# Altium PCB AERO_Geek.PcbDoc
Units mm, origin at the board's own origin, x right, y up, seen from the top; angles counter-clockwise.
Board outline 152.4 x 101.6 mm, 4 copper layers (Top Layer, GND, Power, Bottom Layer), stack 0.778 mm thick; 74 components, 73 nets, 423 pads, 0 vias.
Unrouted connection lines stored in the file: 3.
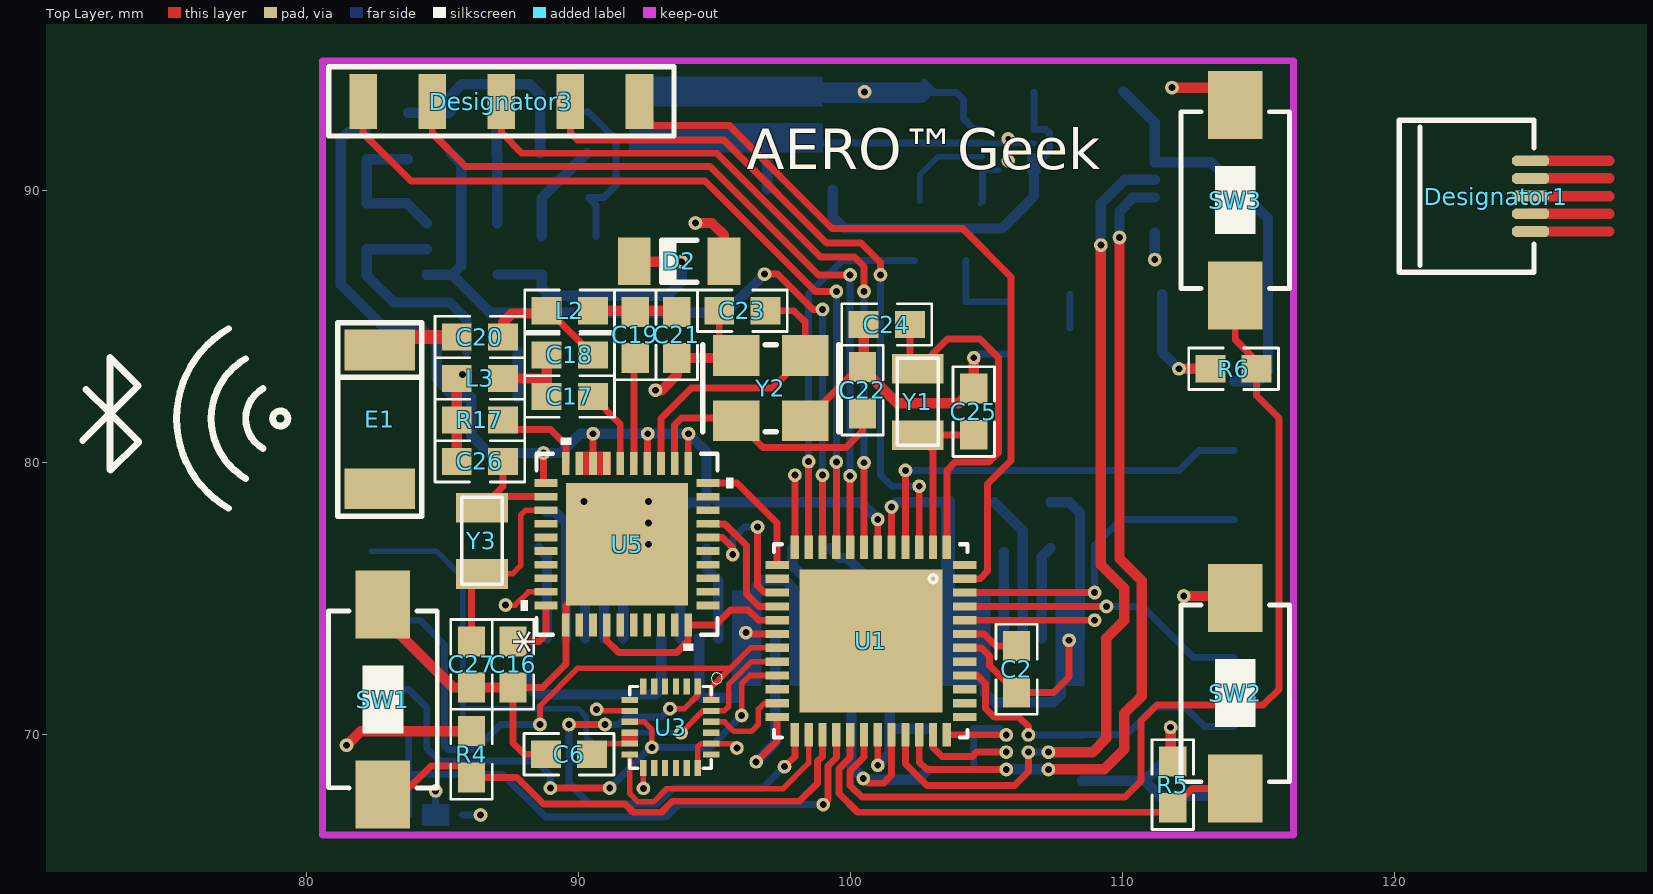
[diagram p0: Top Layer view]
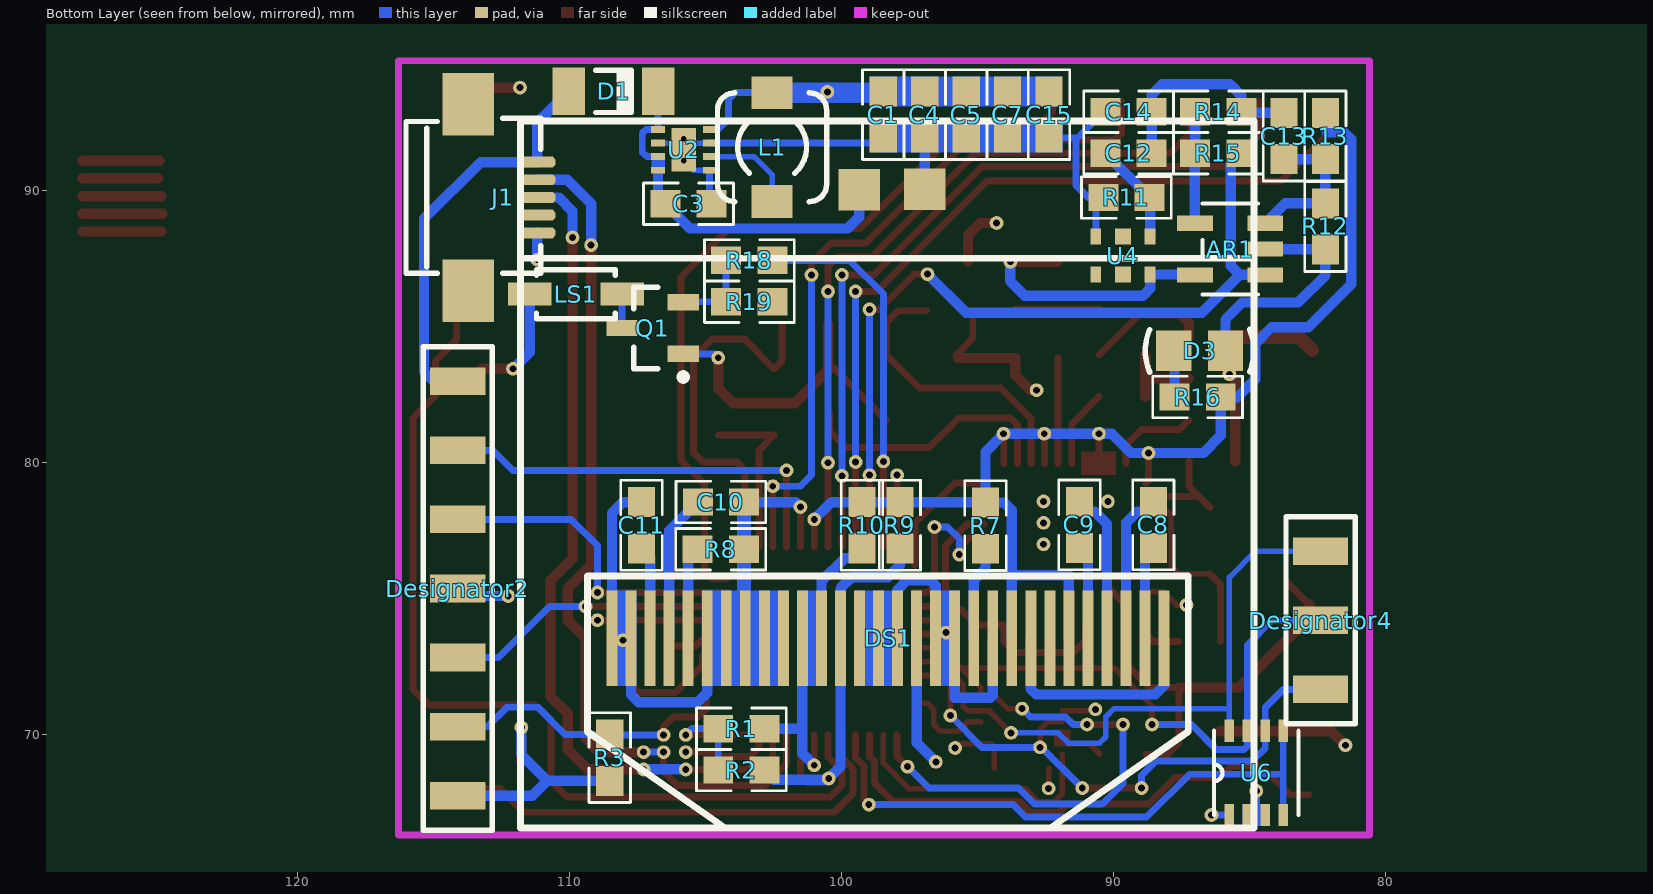
[diagram p1: Bottom Layer view, seen from below]
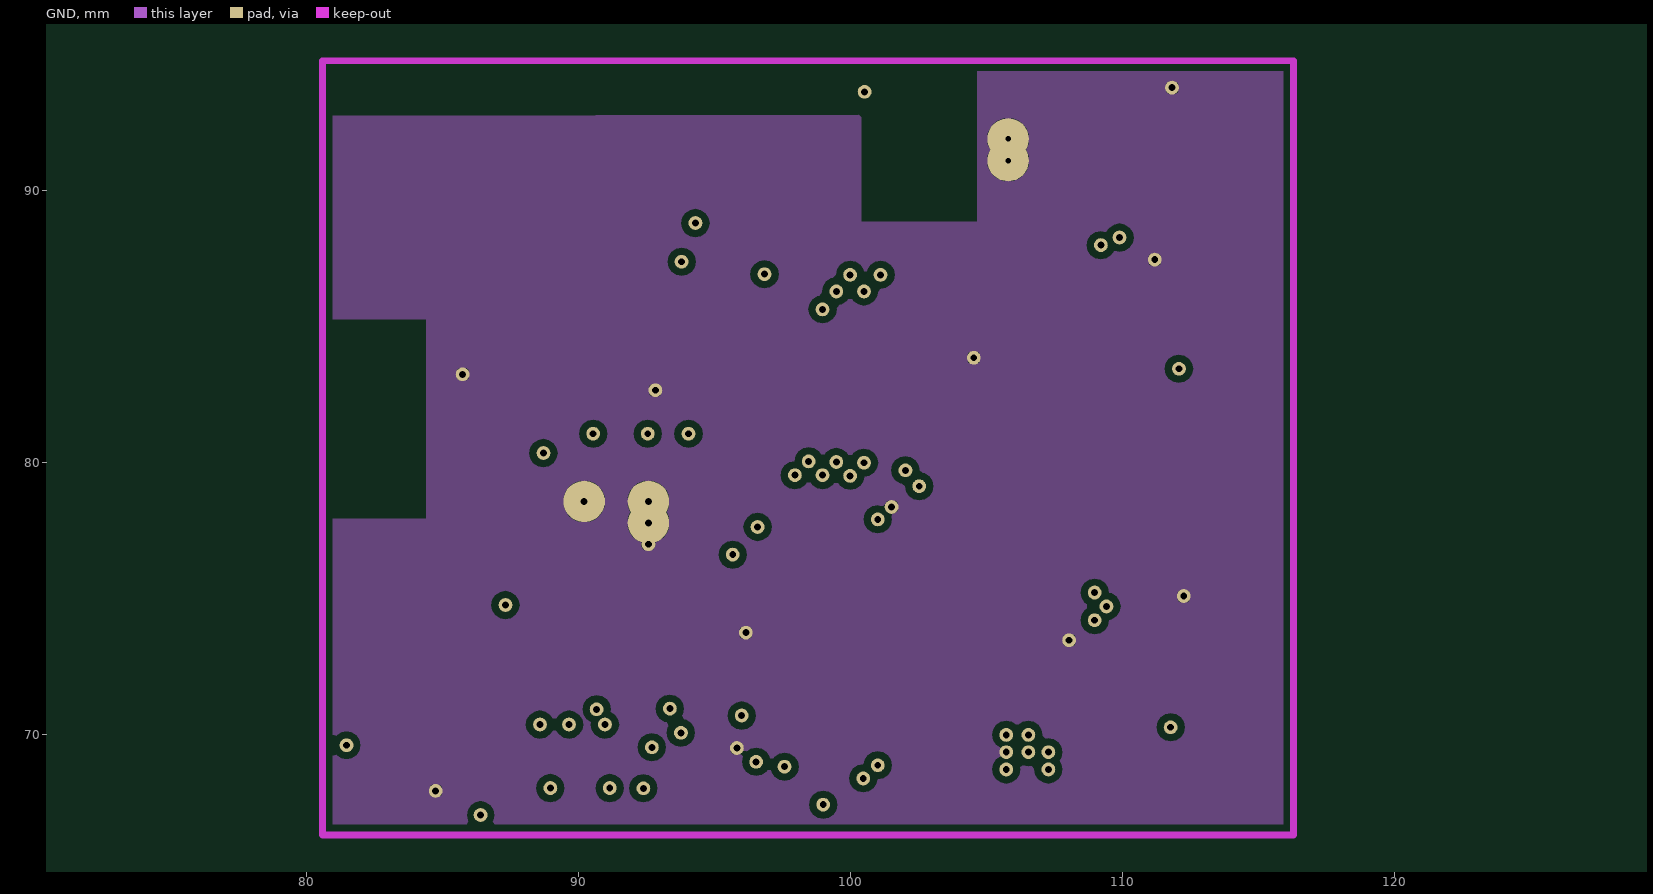
[diagram p2: GND]
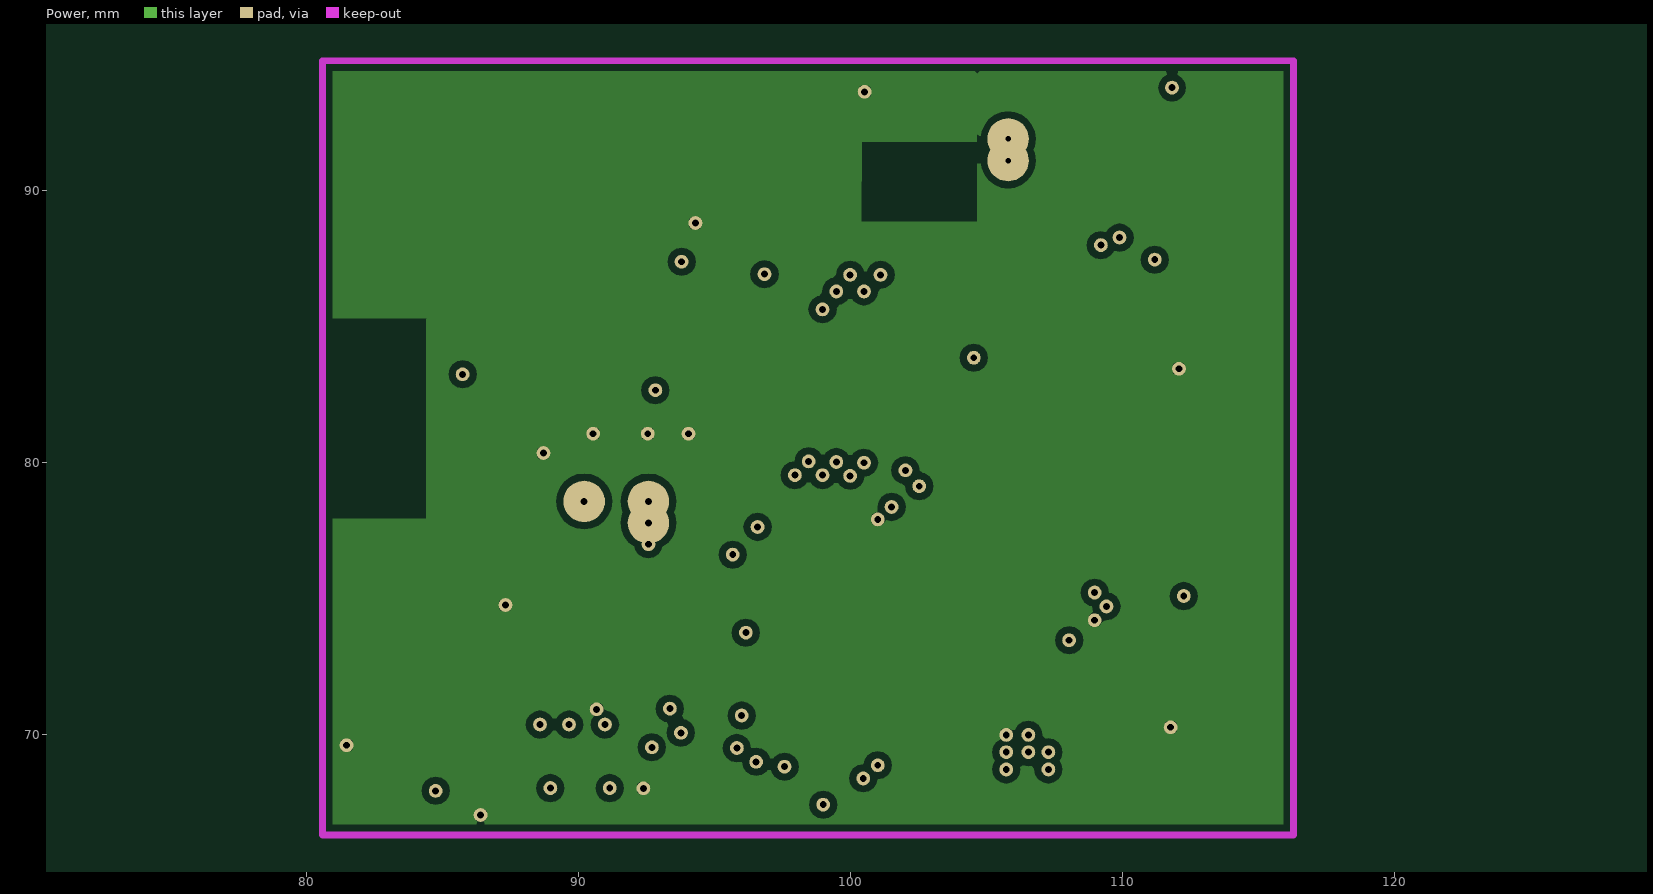
[diagram p3: Power]

## Layer stack, top to bottom
Top Solder: solder mask 0.0102, Solder Resist, Dk 3.5
Top Layer: signal copper 0.0356
Dielectric 1: core 0.254, FR-4, Dk 4.2
GND: signal copper 0.036
Dielectric 3: prepreg 0.127, Dk 4.2
Power: signal copper 0.036
Dielectric 2: core 0.254, Dk 4.2
Bottom Layer: signal copper 0.0356
Bottom Solder: solder mask 0.0102, Solder Resist, Dk 3.5

## Board outline
25.4,25.4 177.8,25.4 177.8,127 25.4,127

## Design rules (kind name [scope] priority, off if disabled: settings)
Clearance [All] p1: gap=0.254
ComponentClearance [All] p1 off: gap=0.254 collisioncheckmode=3 verticalgap=0.254 showdistances=FALSE
PolygonConnect [IsSMTPin Or IsVia vs IsPoly] p1: connectstyle=Direct reliefconductorwidth=0.254 reliefentries=4 polygonreliefangle="90 Angle" airgapwidth=0.254
RoutingVias [All] p1: holewidth=0.711 width=1.27 viastyle="Through Hole" minholewidth=0.711 minwidth=1.27 maxholewidth=0.711 maxwidth=1.27
ShortCircuit [All] p1: allowed=TRUE
SolderMaskExpansion [All] p1: expansion=0.102
UnpouredPolygon [All] p1: allowunpoured=TRUE allowshelved=TRUE
Width [All] p1: maxlimit=2.54 minlimit=0.025 preferedwidth=0.254
27 further rules are at their usual default settings.

## Classes and differential pairs
component class "USB Port": C3 C4 D1 J1 L1 U2
component class Processor: C1 C2 C24 C25 LS1 Q1 R1 R2 R3 R4 R5 R6 R18 R19 SW1 SW2 SW3 U1 Y1
component class "Motion Sensor": C5 C6 U3
component class Display: C7 C8 C9 C10 C11 DS1 R7 R8 R9 R10
component class Bluetooth: C16 C17 C18 C19 C20 C21 C22 C23 C26 C27 E1 L2 L3 R17 U5 Y2 Y3
component class "Beats Monitor": AR1 C12 C13 C14 C15 D2 D3 R11 R12 R13 R14 R15 R16 U4
component class Barometer: C1 U6

## Components (designator, comment, footprint, x,y, rotation, side; value= is the part's Value field where it differs from the comment)
AR1 "MCP6001" SOT23-5 85.725,87.841 r0 bottom
C1 "" 0603 98.476,92.786 r90 bottom
C2 "1uF" 0603 106.121,72.39 r270 top
C3 "" 0603 105.639,89.51 r0 bottom
C4 "" 0603 96.952,92.786 r90 bottom
C5 "CAP" 0603 95.428,92.786 r90 bottom
C6 "CAP" 0603 89.662,69.266 r0 top
C7 "CAP" 0603 93.904,92.786 r90 bottom
C8 "CAP" 0603 88.544,77.699 r90 bottom
C9 "CAP" 0603 91.262,77.699 r270 bottom
C10 "CAP" 0603 104.445,78.537 r0 bottom
C11 "CAP" 0603 107.366,77.686 r270 bottom
C12 "CAP" 0603 89.459,91.364 r180 bottom
C13 "CAP" 0603 83.744,91.999 r270 bottom
C14 "CAP" 0603 89.459,92.888 r180 bottom
C15 "CAP" 0603 92.38,92.786 r90 bottom
C16 "CAP" 0603 87.605,72.568 r270 top
C17 "CAP" 0603 89.687,82.423 r180 top
C18 "CAP" 0603 89.687,83.947 r0 top
C19 "CAP" 0603 92.1,84.684 r90 top
C20 "CAP" 0603 86.385,84.607 r180 top
C21 "CAP" 0603 93.624,84.684 r270 top
C22 "CAP" 0603 100.457,82.652 r270 top
C23 "CAP" 0603 96.037,85.573 r0 top
C24 "CAP" 0603 101.346,85.065 r180 top
C25 "CAP" 0603 104.546,81.864 r90 top
C26 "CAP" 0603 86.385,80.035 r180 top
C27 "CAP" 0603 86.081,72.568 r270 top
D1 "Diode" Diode-SOC 108.382,93.624 r180 bottom
D2 "Diode" Diode-SOC 93.701,87.401 r180 top
D3 "LED" 0805 86.843,84.099 r180 bottom
Designator1 "Comment" "Micro Type-B" 122.479,89.789 r180 top
Designator2 "Comment" HDR1X7 114.122,67.742 r90 bottom
Designator3 "Comment" HDR1X5 92.253,93.269 r180 top
Designator4 "Comment" HDR1X3 82.398,76.733 r270 bottom
DS1 "0.96 OLED" 12864 88.151,73.533 r0 bottom
E1 "Antenna" A6150 82.702,81.458 r270 top
J1 "micro USB" "micro Type-B" 113.741,89.738 r0 bottom
L1 "Inductor" 0420 102.565,91.592 r90 bottom
L2 "Inductor" 0603 89.687,85.573 r180 top
L3 "Inductor" 0603 86.385,83.083 r180 top
LS1 "Buzzer" 420 109.779,86.182 r180 bottom
Q1 "NPN" SOT23 106.959,84.938 r0 bottom
R1 "RES" 0603 103.695,70.206 r0 bottom
R2 "RES" 0603 103.695,68.682 r0 bottom
R3 "RES" 0603 108.534,69.139 r270 bottom
R4 "RES" 0603 86.081,69.266 r270 top
R5 "RES" 0603 111.862,68.148 r270 top
R6 "RES" 0603 114.097,83.439 r0 top
R7 "RES" 0603 94.717,77.673 r270 bottom
R8 "RES" 0603 104.453,76.803 r0 bottom
R9 "RES" 0603 97.866,77.686 r270 bottom
R10 "RES" 0603 99.263,77.686 r270 bottom
R11 "RES" 0603 89.535,89.738 r180 bottom
R12 "RES" 0603 82.22,88.671 r90 bottom
R13 "RES" 0603 82.22,91.999 r90 bottom
R14 "RES" 0603 86.157,92.888 r0 bottom
R15 "RES" 0603 86.157,91.364 r180 bottom
R16 "RES" 0603 86.919,82.398 r180 bottom
R17 "RES" 0603 86.385,81.559 r180 top
R18 "RES" 0603 103.403,87.427 r0 bottom
R19 "RES" 0603 103.403,85.903 r0 bottom
SW1 "SW" SW-PB2 82.829,71.323 r270 top
SW2 "SW" SW-PB2 114.173,71.552 r270 top
SW3 "SW" SW-PB2 114.173,89.687 r270 top
U1 "SAMD21G18A-AUT" QFN48 100.762,73.431 r270 top
U2 "TPS62063" DSG08 105.811,91.491 r0 bottom
U3 "MPU9250" QFN24 93.396,70.256 r270 top
U4 "APDS-9008" chipLED 89.662,87.605 r180 bottom
U5 "CC2540" VQFN40 91.796,76.987 r90 top
U6 "MS5611" QFN8 84.76,68.58 r90 bottom
Y1 "XTAL" ABS07 102.489,82.22 r90 top
Y2 "Oscillator" ASFL1 97.079,82.728 r0 top
Y3 "XTAL" ABS07 86.462,77.114 r90 top

## Footprints (in the part's own frame and the unit in brackets; to place one, negate y for a bottom-side part, rotate by r counter-clockwise, add the part's x,y. Pads: shape width x height; smd on the part's side, far side on the other; paste and mask are expansions set on the pad)
0420 [mm]
  rect 1.2x1.5 smd: 1(-2,0) 2(2,0)
  silkscreen extent -2.01,-2.01 1.99,2.01, body extent -2,-2 2,2, height 4
420 [mm]
  rect 1.6x0.85 smd: 1(-1.7,0) 2(1.7,0)
  silkscreen extent -1.45,-0.9 1.45,0.9
0603 [mm] "Chip Capacitor, Body 1.0x0.5mm, IPC High Density"
  rect 1.1x1 smd: 1(-0.85,0) 2(0.85,0)
  silkscreen extent -1.65,-0.76 1.65,0.76, body extent -1.14,-0.38 1.14,0.38, height 1
0805 [mm]
  rect 1.3x1.5 smd: 1(-0.95,0) 2(0.95,0)
  silkscreen extent -2,-0.79 2,0.79, body extent -1.27,-0.64 1.27,0.64, height 0.9
12864 [mm]
  rect 0.4x3.5 smd: 1(0,0) 2(0.7,0) 3(1.4,0) 4(2.1,0) 5(2.8,0) 6(3.5,0) 7(4.2,0) 8(4.9,0) 9(5.6,0) 10(6.3,0) 11(7,0) 12(7.7,0) 13(8.4,0) 14(9.1,0) 15(9.8,0) 16(10.5,0) 17(11.2,0) 18(11.9,0) 19(12.6,0) 20(13.3,0) 21(14,0) 22(14.7,0) 23(15.4,0) 24(16.1,0) 25(16.8,0) 26(17.5,0) 27(18.2,0) 28(18.9,0) 29(19.6,0) 30(20.3,0)
  silkscreen extent -3.3,-19.01 23.66,6.98
A6150 [mm]
  rect 1.5x2.6 smd: 1(-2.667,0) N/A(2.433,0)
  silkscreen extent -3.67,-1.55 3.43,1.55, body extent -3.18,-1.99 2.92,1.91, height 1.1
ABS07 [mil]
  rect 43x75 smd paste-1000 mask-1000: 1(-48,0) 2(48,0)
  silkscreen extent -63,-30 63,30
ASFL1 [mm]
  rect 1.7x1.5 smd paste-25.4 mask-25.4: 1(-1.27,-1.2) 2(1.27,-1.2) 3(1.27,1.2) 4(-1.27,1.2)
  silkscreen extent -2.5,-1.6 2.5,1.6
chipLED [mm]
  rect 0.4x0.6 smd paste-25.4 mask-25.4: 1(-1,0.7) 3(1,0.7) 4(1,-0.7) 6(-1,-0.7)
  rect 0.6x0.6 smd paste-25.4 mask-25.4: 2(0,0.7) 5(0,-0.7)
Diode-SOC [mm]
  rect 1.2x1.75 smd: 1(-1.663,0.013) 2(1.637,0.013)
  silkscreen extent -0.66,-0.76 0.64,0.79, body extent -1.86,-0.78 1.84,0.81, height 1.59
DSG08 [mm]
  rect 0.5x0.25 smd paste-0.14 mask+0.076: 1(-0.95,0.75) 2(-0.95,0.25) 3(-0.95,-0.25) 4(-0.95,-0.75) 5(0.95,-0.75) 6(0.95,-0.25) 7(0.95,0.25) 8(0.95,0.75)
  rect 0.9x1.6 smd paste-0.45 mask+0.076: 9(0,0)
  round 0.5 / inner round 1.524 / far side round 0.5 hole 0.203 mask+0.076: V(0,-0.4) V(0,0.4)
HDR1X3 [mil] "Connector; Header; 3 Position"
  rect 40x80 smd: 1(0,0) 2(100,0) 3(200,0)
  silkscreen extent -50,-50 250,50
HDR1X5 [mil] "Connector; Header; 5 Position"
  rect 40x80 smd: 1(0,0) 2(100,0) 3(200,0) 4(300,0) 5(400,0)
  silkscreen extent -50,-50 450,50
HDR1X7 [mil] "Connector; Header; 7 Position"
  rect 40x80 smd: 1(0,0) 2(100,0) 3(200,0) 4(300,0) 5(400,0) 6(500,0) 7(600,0)
  silkscreen extent -50,-50 650,50
"Micro Type-B" [mm]
  oct 1.35x0.4 smd: 1(-2.54,-1.3) 2(-2.54,-0.65) 3(-2.54,0) 4(-2.54,0.65) 5(-2.54,1.3)
  rect 0x0 smd: 6(0,3.429) 7(0,-3.429)
  silkscreen extent -2.67,-2.79 2.29,2.79
"micro Type-B" [mm]
  oct 1.35x0.4 smd: 1(-2.54,-1.3) 2(-2.54,-0.65) 3(-2.54,0) 4(-2.54,0.65) 5(-2.54,1.3)
  rect 1.9x2.286 smd: 6(0,3.429) 7(0,-3.429)
  silkscreen extent -2.67,-2.92 2.29,2.79
QFN8 [mil]
  rect 32x14 smd paste-1000 mask-1000: 1(-61,39) 2(-61,13) 3(-61,-13) 4(-61,-39) 5(61,-39) 6(61,-13) 7(61,13) 8(61,39)
  silkscreen extent -61,-61 61,61
QFN24 [mm]
  rect 0.6x0.23 smd paste-25.4 mask-25.4: 1(-1.5,1) 2(-1.5,0.6) 3(-1.5,0.2) 4(-1.5,-0.2) 5(-1.5,-0.6) 6(-1.5,-1) 13(1.5,-1) 14(1.5,-0.6) 15(1.5,-0.2) 16(1.5,0.2) 17(1.5,0.6) 18(1.5,1)
  rect 0.23x0.6 smd paste-25.4 mask-25.4: 7(-1,-1.5) 8(-0.6,-1.5) 9(-0.2,-1.5) 10(0.2,-1.5) 11(0.6,-1.5) 12(1,-1.5) 19(1,1.5) 20(0.6,1.5) 21(0.2,1.5) 22(-0.2,1.5) 23(-0.6,1.5) 24(-1,1.5)
  silkscreen extent -2,-1.5 1.5,1.9
QFN48 [mil]
  rect 34x12 smd paste-1000 mask-1000: 1(-135.83,110) 2(-135.83,90) 3(-135.83,70) 4(-135.83,50) 5(-135.83,30) 6(-135.83,10) 7(-135.83,-10) 8(-135.83,-30) 9(-135.83,-50) 10(-135.83,-70) 11(-135.83,-90) 12(-135.83,-110) 25(135.83,-110) 26(135.83,-90) 27(135.83,-70) 28(135.83,-50) 29(135.83,-30) 30(135.83,-10) 31(135.83,10) 32(135.83,30) 33(135.83,50) 34(135.83,70) 35(135.83,90) 36(135.83,110)
  rect 12x34 smd paste-1000 mask-1000: 13(-110,-135.83) 14(-90,-135.83) 15(-70,-135.83) 16(-50,-135.83) 17(-30,-135.83) 18(-10,-135.83) 19(10,-135.83) 20(30,-135.83) 21(50,-135.83) 22(70,-135.83) 23(90,-135.83) 24(110,-135.83) 37(110,135.83) 38(90,135.83) 39(70,135.83) 40(50,135.83) 42(10,135.83) 43(-10,135.83) 44(-30,135.83) 45(-50,135.83) 46(-70,135.83) 47(-90,135.83) 48(-110,135.83)
  rect 12x34 smd paste-1000: 41(30,135.83)
  rect 207x207 smd mask-1000: 49(0,0)
  silkscreen extent -140,-140 140,140
SOT23 [mm]
  rect 1.15x0.6 smd: 1(-1.125,0.95) 2(-1.125,-0.95) 3(1.125,0)
  silkscreen extent -1.25,-1.5 0.7,1.92, body extent -0.7,-1.5 0.7,1.5, height 1.1
SOT23-5 [mil]
  rect 52x22 smd paste-1000 mask-1000: 1(-51,37.4) 2(-51,0) 3(-51,-37.4) 4(51,-37.4) 5(51,37.4)
  silkscreen extent -40,-66 40,66
SW-PB2 [mm]
  rect 2.5x2 smd: 1(-3.454,-0.013) 2(3.546,-0.013)
  silkscreen extent -3.2,-2.01 3.3,1.99, body extent -3.2,-2.04 3.28,2.02, height 1.2
VQFN40 [mm]
  rect 0.85x0.28 smd paste-0.14: 1(-2.975,2.25) 2(-2.975,1.75) 3(-2.975,1.25) 4(-2.975,0.75) 5(-2.975,0.25) 6(-2.975,-0.25) 7(-2.975,-0.75) 8(-2.975,-1.25) 9(-2.975,-1.75) 10(-2.975,-2.25) 21(2.975,-2.25) 22(2.975,-1.75) 23(2.975,-1.25) 24(2.975,-0.75) 25(2.975,-0.25) 26(2.975,0.25) 27(2.975,0.75) 28(2.975,1.25) 29(2.975,1.75) 30(2.975,2.25)
  rect 0.28x0.85 smd paste-0.14: 11(-2.251,-2.975) 12(-1.75,-2.975) 13(-1.25,-2.975) 14(-0.75,-2.975) 15(-0.25,-2.975) 16(0.25,-2.975) 17(0.75,-2.975) 18(1.25,-2.975) 19(1.75,-2.975) 20(2.251,-2.975) 31(2.251,2.975) 32(1.75,2.975) 33(1.25,2.975) 34(0.75,2.975) 35(0.25,2.975) 36(-0.25,2.975) 37(-0.75,2.975) 38(-1.25,2.975) 39(-1.75,2.975) 40(-2.251,2.975)
  rect 4.5x4.5 smd paste-2.237 mask-2.235: 41(0,0)
  round 0 all layers, no hole: V(-1.575,1.575) V(-1.575,-0.787) V(-1.575,0) V(-1.575,0.787) V(-1.575,-1.575) V(-0.787,0.787) V(-0.787,1.575) V(-0.787,0) V(-0.787,-1.575) V(-0.787,-0.787) V(0,1.575) V(0,0.787) V(0,0) V(0,-1.575) V(0.787,0.787) V(0.787,1.575) V(0.787,0) V(0.787,-1.575) V(1.575,0) V(1.575,0.787) V(1.575,-1.575)
  round 0.508 hole 0.254: V(0,-0.787)
  round 0.508 / inner round 1.524 / far side round 0.508 hole 0.254: V(0.787,-0.787) V(1.575,1.575) V(1.575,-0.787)
  silkscreen extent -3.91,-3.91 3.91,3.91

## Part data
AR1: "Op Amp"
C1 C2 C3 C4: library part CAP, "Capacitor"
C5 C6 C7 C8 C9 C10 C11 C12 C13 C14 C15 C16 C17 C18 C19 C20 C21 C22 C23 C24 C25 C26 C27: "Capacitor"
D3: "Typical BLUE SiC LED"
DS1: library part SSD1306
LS1: "Magnetic Transducer Buzzer"
Q1: "NPN Bipolar Transistor"
R1 R2 R3 R4 R5 R6 R7 R8 R9 R10 R11 R12 R13 R14 R15 R16 R17 R18 R19: "Resistor"
U3: "Gyroscope/Accelerometer/Magnetometer Sensor"
U4: "Ambient Light Sensor"
U6: "Pressure Sensor"
Y1 Y3: "Crystal Oscillator"

## Free pads (board coordinates)
  round 0.508 hole 0.254 paste+0: 2(92.71,69.52) 2(93.802,87.376) 2(98.476,80.035) 2(98.984,79.527) 2(99.009,67.412) 2(99.492,80.01) 2(100,79.502) 2(100.482,68.377) 2(100.508,79.985) 2(101.016,68.859) 2(102.032,79.705) 2(102.54,79.121) 2(105.74,68.707) 2(105.74,69.342) 2(105.74,69.977) 2(106.553,69.342) 2(108.052,73.457)
  round 0.508 hole 0.254: 4(96.012,70.688) 7(81.483,69.596) 7(84.76,67.92) 7(85.75,83.236) 7(86.411,67.031) 7(87.325,74.752) 7(88.595,70.358) 7(88.722,80.34) 7(88.976,68.021) 7(89.662,70.358) 7(90.551,81.051) 7(90.678,70.917) 7(90.983,70.358) 7(91.161,68.021) 7(92.396,68.012) 7(92.558,81.051) 7(92.837,82.652) 7(93.37,70.942) 7(93.777,70.053) 7(94.056,81.051) 7(94.31,88.798) 7(95.834,69.494) 7(96.164,73.736) 7(96.545,68.986) 7(96.85,86.919) 7(97.587,68.809) 7(97.968,79.527) 7(98.984,85.623) 7(99.492,86.284) 7(100,86.893) 7(100.508,86.284) 7(100.533,93.624) 7(101.016,77.902) 7(101.117,86.893) 7(101.524,78.359) 7(104.546,83.845) 7(106.553,69.977) 7(107.29,68.707) 7(107.29,69.342) 7(108.991,74.193) 7(108.991,75.209) 7(109.22,87.986) 7(109.423,74.701) 7(109.906,88.265) 7(111.201,87.452) 7(111.785,70.256) 7(111.836,93.777) 7(112.09,83.439) 7(112.268,75.082) ""(95.682,76.606) ""(96.596,77.622)
  rect 1.524x1.524 smd far side: 8(96.952,90.043) 8(99.365,90.018)

## Nets (pads, with @x,y where several pads share a name; then routed paths per layer and width w, separated by ;. In a path a pad name is that pad's centre, name@x,y a point inside that pad or via, vN(x,y) a via of type N, cw(c..) or ccw(c..) an arc to the next point about the centre after c; other vN are vias at no path point)
3V3: C1.2 C4.2 C5.2 C7.2 C15.2 D2.1 Designator2.1 DS1.6 DS1.9 L1.2 LS1.1 pad.2@105.74,69.977 pad.7@81.483,69.596 pad.7@86.411,67.031 pad.7@87.325,74.752 pad.7@88.722,80.34 pad.7@90.551,81.051 pad.7@90.678,70.917 pad.7@92.396,68.012 pad.7@92.558,81.051 pad.7@94.31,88.798 pad.7@94.056,81.051 pad.7@100.533,93.624 pad.7@101.016,77.902 pad.7@108.991,74.193 pad.7@111.785,70.256 pad.7@112.09,83.439 R1.2 R2.2 R3.2 R4.1 R5.1 R6.1 R7.1 R9.1 R10.1 R13.2 R16.2 U1.6 U1.17 U1.36 U1.44 U2.4 U3.8 U3.13 U5.4 U5.10 U5.21 U5.24 U5.27 U5.28 U5.29 U5.31 U5.39 U6.1 | length 99.7
  Top Layer w0.203: pad.7@87.325,74.752 87.681,74.752 88.166,75.237 U5.39 ; pad.7@90.678,70.917 90.738,70.856 U3.8 ; pad.7@92.396,68.012 U3.13
  Top Layer w0.254: pad.7@88.722,80.34 88.722,79.336 U5.31 ; U5.28 pad.7@90.546,81.046 ; U5.4 91.046,73.445 91.491,73 93.624,73 94.046,73.421 U5.10 95.044,74.012 95.606,74.574 96.241,74.574 96.622,74.193 U1.17 ; U5.24 pad.7@92.546,81.039 ; U5.21 pad.7@94.046,81.041 ; U1.6 pad.7@101.016,77.902 ; U1.36 pad.2@105.74,69.981 ; U1.44 pad.7@108.991,74.193
  Top Layer w0.381: pad.7@81.483,69.596 82.003,70.116 R4.1 ; pad.7@94.31,88.798 94.92,88.798 95.363,88.355 D2.1 ; R5.1@111.785,68.998 pad.7@111.785,70.256 ; pad.7@112.09,83.439 R6.1
  Bottom Layer w0.254: U6.1 pad.7@86.411,67.031 ; L1.2 103.918,93.592 104.165,93.345 104.165,92.634 104.558,92.241 U2.4@104.838,92.241 ; L1.2@102.718,93.98 L1.2@103.048,93.65 ; R2.2 R1.2 105.512,70.206 pad.2@105.74,69.977
  Bottom Layer w0.381: R13.2 82.181,92.849 82.181,92.143 81.536,92.143 81.275,91.883 81.275,86.543 82.855,84.963 84.201,84.963 84.798,84.366 84.798,83.051 85.452,82.398 R16.2 86.069,80.987 86.716,80.34 88.722,80.34 89.357,80.34 90.068,81.051 90.551,81.051 92.558,81.051 94.056,81.051 94.717,80.391 R7.1 94.043,78.523 93.751,78.231 93.751,75.844 ; DS1.6 91.651,75.837 91.658,75.844 93.751,75.844 ; DS1.9 93.751,75.844 ; R7.1@95.071,78.613 95.148,78.536 R9.1 R10.1 100.382,78.536 pad.7@101.016,77.902 ; R3.2 110.834,68.289 ; LS1.1 111.479,84.05 pad.7@112.09,83.439 ; pad.7@111.785,70.256 111.785,69.24 110.834,68.289 ; Designator2.1 111.381,67.742 110.834,68.289
  Bottom Layer w0.762: C1.2@98.476,93.592 L1.2
5V: D1.1 Designator2.7 J1.1 | length 15.1
  Bottom Layer w0.381: D1.1 111.201,92.48 J1.1 113.279,91.038 115.367,88.951 115.367,83.337 115.011,82.982 Designator2.7
A1: Designator3.3 pad.2@100.508,79.985 pad.7@100.508,86.284 U1.7 | length 26.8
  Top Layer w0.254: Designator3.3 87.173,92.126 87.935,91.364 95.098,91.364 95.479,90.983 98.908,87.554 100.152,87.554 100.508,87.198 pad.7@100.508,86.284 ; U1.7 pad.2@100.508,79.985
  Bottom Layer w0.254: pad.2@100.508,79.985 pad.7@100.508,86.284
A2: Designator3.4 pad.2@100,79.502 pad.7@100,86.893 U1.8 | length 28.7
  Top Layer w0.254: Designator3.4 84.633,92.1 85.852,90.881 94.844,90.881 98.831,86.893 pad.7@100,86.893 ; U1.8 pad.2@100,79.502
  Bottom Layer w0.254: pad.2@100,79.502 pad.7@100,86.893
A3: Designator3.5 pad.2@99.492,80.01 pad.7@99.492,86.284 U1.9 | length 30.4
  Top Layer w0.254: Designator3.5 82.093,92.1 83.845,90.348 94.666,90.348 98.73,86.284 pad.7@99.492,86.284 ; U1.9 pad.2@99.492,80.01
  Bottom Layer w0.254: pad.2@99.492,80.01 pad.7@99.492,86.284
A4: AR1.1 pad.2@98.984,79.527 pad.7@96.85,86.919 pad.7@98.984,85.623 R15.2 U1.10 | length 29.8
  Top Layer w0.254: pad.7@96.85,86.919 97.333,86.919 98.628,85.623 pad.7@98.984,85.623 ; U1.10 pad.2@98.984,79.527
  Bottom Layer w0.254: pad.2@98.984,79.527 pad.7@98.984,85.623
  Bottom Layer w0.381: AR1.1 85.367,86.891 ; R15.2 85.7,90.971 85.7,87.224 85.367,86.891 ; pad.7@96.85,86.919 95.428,85.496 86.761,85.496 85.367,86.891
A5: Designator3.1 U1.47 | length 28.7
  Top Layer w0.254: Designator3.1 92.253,92.888 92.761,92.38 95.555,92.38 99.339,88.595 104.14,88.595 105.918,86.817 105.918,80.061 105.054,79.197 105.054,75.997 104.775,75.717 U1.47@104.237,75.717
AREF: Designator2.6 pad.2@102.032,79.705 U1.4 | length 15.2
  Top Layer w0.254: U1.4 pad.2@102.032,79.705
  Bottom Layer w0.254: pad.2@102.032,79.705 112.09,79.705 112.827,80.442 Designator2.6
BAT: C3.2 D1.2 pad.8@99.365,90.018 U2.5 U2.7 U2.8 | length 13.4
  Bottom Layer w0.254: U2.7 107.167,91.241 107.34,91.415 107.34,92.1 107.2,92.241 U2.5 D1.2@106.761,93.621
  Bottom Layer w0.381: pad.8@99.365,90.018 99.365,89.027 99.797,88.595 105.574,88.595 C3.2 106.761,89.782 U2.8
D2: U1.13 U5.20 | length 4.7
  Top Layer w0.254: U5.20 95.844,79.238 97.312,77.77 U1.13
D3: U1.14
D4: U1.23 U3.22 | length 3.3
  Top Layer w0.203: U3.22 95.38,70.456 95.733,70.104 96.368,70.104 96.622,70.358 96.622,70.917 96.85,71.145 U1.23
D5: DS1.14 pad.7@96.545,68.986 U1.24 | length 6.8
  Top Layer w0.254: pad.7@96.545,68.986 97.312,69.753 U1.24
  Bottom Layer w0.381: pad.7@96.545,68.986 97.251,69.692 DS1.14
D6: R5.2 SW2.2 U1.29 | length 17.5
  Top Layer w0.254: U1.29 100,69.139 99.593,68.732 99.593,67.818 100.279,67.132 111.696,67.132 R5.2 112.57,68.006 SW2.2
D7: R6.2 SW3.2 U1.30 | length 36.1
  Top Layer w0.254: U1.30 100.508,69.164 100,68.656 100,68.123 100.432,67.691 110.109,67.691 110.693,68.275 110.693,70.485 111.277,71.069 115.189,71.069 115.773,71.653 115.773,81.636 114.947,82.462 R6.2 114.947,83.732 114.16,84.519 SW3.2
D8: pad.2@98.476,80.035 R18.1 U1.11 | length 13.7
  Top Layer w0.254: U1.11 pad.2@98.476,80.035
  Bottom Layer w0.254: pad.2@98.476,80.035 98.476,86.182 99.72,87.427 R18.1@102.362,87.427
D9: pad.7@97.968,79.527 U1.12 | length 2.6
  Top Layer w0.254: U1.12 pad.7@97.968,79.527
D10: R4.2 SW1.2 U1.27 | length 19.4
  Top Layer w0.254: SW1.2 83.526,67.778 84.582,68.834 85.662,68.834 R4.2 87.743,68.416 88.722,67.437 91.719,67.437 92.024,67.132 93.066,67.132 93.472,67.539 98.146,67.539 98.806,68.199 98.806,69.012 98.984,69.19 U1.27
D11: pad.7@89.662,70.358 pad.7@90.983,70.358 pad.7@93.37,70.942 pad.7@97.587,68.809 U1.25 U3.1 | length 17.8
  Top Layer w0.203: pad.7@93.37,70.942 93.904,70.942 94.396,71.434 U3.1
  Top Layer w0.254: pad.7@89.662,70.358 pad.7@90.983,70.358 ; pad.7@97.587,68.809 97.968,69.19 U1.25
  Bottom Layer w0.254: pad.7@89.662,70.358 89.662,68.199 90.424,67.437 92.913,67.437 93.497,68.021 96.799,68.021 pad.7@97.587,68.809 ; pad.7@90.983,70.358 91.491,70.358 91.77,70.637 93.066,70.637 pad.7@93.37,70.942
D12: pad.2@99.009,67.412 U1.28 U6.4 U6.5 | length 22
  Top Layer w0.254: pad.2@99.009,67.412 99.187,67.589 99.187,68.834 99.492,69.139 U1.28
  Bottom Layer w0.254: U6.4 U6.5 ; 83.769,68.529 87.224,68.529 88.798,66.954 93.243,66.954 93.701,67.412 pad.2@99.009,67.412
D13: U1.26 U3.12 | length 9.8
  Top Layer w0.203: U3.12 91.896,67.819 92.202,67.513 92.761,67.513 93.243,67.996 97.536,67.996 98.476,68.936 U1.26
DAC: Designator3.2 pad.2@102.54,79.121 pad.7@101.117,86.893 U1.3 | length 26.2
  Top Layer w0.254: Designator3.2 89.713,92.1 89.967,91.846 95.352,91.846 95.631,91.567 99.136,88.062 100.406,88.062 101.117,87.351 pad.7@101.117,86.893 ; U1.3 pad.2@102.54,79.121
  Bottom Layer w0.254: pad.7@101.117,86.893 101.117,79.527 101.524,79.121 102.54,79.121 pad.2@102.565,79.121
GND: AR1.2 C1.1 C2.2 C3.1 C4.1 C5.1 C6.1 C7.1 C10.1 C11.1 C14.1 C15.1 C16.2 C21.2 C22.1 C23.1 C24.2 C25.2 C26.2 C27.2 D3.2 Designator2.4 DS1.1 DS1.8 DS1.10 DS1.12 DS1.13 DS1.15 DS1.16 DS1.17 DS1.21 DS1.22 DS1.23 DS1.24 DS1.25 DS1.29 DS1.30 J1.5 L3.2 pad.2@105.74,69.342 pad.2@108.052,73.457 pad.7@84.76,67.92 pad.7@85.75,83.236 pad.7@92.837,82.652 pad.7@95.834,69.494 pad.7@96.164,73.736 pad.7@101.524,78.359 pad.7@104.546,83.845 pad.7@111.201,87.452 pad.7@111.836,93.777 pad.7@112.268,75.082 pad.8@96.952,90.043 Q1.1 R8.1 R11.1 R12.1 R17.2 R19.1 SW1.1 SW2.1 SW3.1 U1.5 U1.18 U1.35 U1.42 U2.1 U2.3 U2.6 U2.9 U2.V U3.18 U3.20 U4.1 U5.1 U5.41 U5.V@90.221,78.562 U5.V@92.583,76.987 U5.V@92.583,77.775 U5.V@92.583,78.562 U6.2 U6.3 Y2.2 Y2.4 | length 127
  Top Layer w0.203: U3.18 94.396,69.54 94.512,69.656 U3.20 95.672,69.656 pad.7@95.834,69.494
  Top Layer w0.254: SW1.1 SW1.1@83.603,75.564 ; C6.1 88.011,69.266 87.605,69.672 C16.2 88.685,71.718 89.546,72.578 U5.1 89.546,74.737 U5.41@90.221,75.413 ; C23.1 95.187,84.549 Y2.4 ; pad.7@96.164,73.736 96.215,73.685 U1.18 ; Y2.2 100.323,83.502 C22.1 ; U1.5 pad.7@101.524,78.359 ; U1.35 103.048,69.52 103.378,69.19 104.496,69.19 104.648,69.342 pad.2@105.74,69.342 ; U1.42 104.826,73.177 105.131,72.873 105.131,72.531 C2.2 107.481,71.54 108.052,72.111 pad.2@108.052,73.457
  Top Layer w0.381: SW1.1 82.817,74.308 85.407,71.718 C27.2 C16.2 ; C26.2 R17.2 L3.2 ; pad.7@92.837,82.652 93.066,82.652 93.624,83.21 C21.2 Y2.4@95.715,83.834 ; C24.2 100.496,83.4 101.727,82.169 104.001,82.169 C25.2 pad.7@104.546,83.845 ; pad.7@111.836,93.777 113.525,93.777 SW3.1 ; pad.7@112.268,75.082 114.084,75.082 SW2.1
  Bottom Layer w0.203: C3.1 C3.1@104.861,89.582 ; U2.1 U2.9@105.461,90.741 ; U2.3 U2.V@105.661,91.741 ; U2.V@105.961,91.741 U2.6
  Bottom Layer w0.254: 84.76,67.081 pad.7@84.76,67.92 ; C14.1 90.374,92.888 91.389,91.872 91.389,90.188 90.939,89.738 R11.1 90.662,89.461 U4.1 ; 91.325,91.936 C15.1 ; C1.1 98.671,91.741 U2.3 ; pad.7@104.546,83.845 104.689,83.988 Q1.1 ; C3.1@104.861,89.582 U2.1
  Bottom Layer w0.381: R12.1 82.22,86.868 83.21,85.877 85.268,85.877 85.893,85.253 D3.2 ; R12.1@82.22,87.841 AR1.2 ; DS1.1 88.151,71.793 88.481,71.463 92.85,71.463 93.051,71.664 DS1.8 ; DS1.10 94.451,71.437 94.548,71.34 95.851,71.34 DS1.12 ; DS1.13 96.551,75.469 96.746,75.664 97.609,75.664 97.951,75.322 DS1.15 ; pad.8@96.952,90.043 C4.1 ; pad.7@101.524,78.359 101.702,78.537 C10.1 ; 104.639,73.845 DS1.25 104.951,71.528 105.308,71.171 107.467,71.171 107.751,71.454 DS1.29 ; C11.1 108.052,78.536 108.451,78.138 DS1.30 ; pad.7@111.201,87.452 J1.5 ; pad.7@112.268,75.082 Designator2.4@113.64,75.082
  Bottom Layer w0.508: DS1.23@103.595,73.577 C10.1
MISO: Designator4.3 pad.2@92.71,69.52 pad.4 pad.7@88.976,68.021 pad.7@91.161,68.021 U1.21 U3.9 U6.6 | length 21.6
  Top Layer w0.203: U3.9 92.434,70.456 92.71,70.18 pad.2@92.71,69.52 ; pad.4 96.012,71.857 96.317,72.161 U1.21
  Top Layer w0.254: pad.7@88.976,68.021 pad.7@91.161,68.021
  Bottom Layer w0.254: Designator4.3 83.769,71.653 84.43,70.993 U6.6 84.43,69.494 84.912,69.012 88.443,69.012 88.976,68.478 pad.7@88.976,68.021 ; pad.7@91.161,68.021 92.71,69.571 92.71,69.52 94.844,69.52 pad.4
MOSI: Designator4.2 pad.7@88.595,70.358 U1.19 U3.24 U6.7 | length 22.5
  Top Layer w0.203: pad.7@88.595,70.358 88.595,71.044 89.98,72.428 95.593,72.428 ; U3.24 94.896,71.731 95.593,72.428 ; U1.19 96.342,73.177 95.593,72.428
  Bottom Layer w0.254: Designator4.2 84.176,74.193 85.09,73.279 U6.7 85.09,69.571 85.217,69.444 86.233,69.444 87.147,70.358 pad.7@88.595,70.358
NetAR1_3: AR1.3 C13.2 R12.2 R13.1 | length 5.7
  Bottom Layer w0.381: C13.2 R13.1 R12.2 83.699,89.521 AR1.3
NetAR1_4: AR1.4 R14.2 R15.1 | length 4.1
  Bottom Layer w0.381: R15.1 R14.2 ; AR1.4 R15.1@87.02,91.35
NetAR1_5: AR1.5 D2.2 pad.2@93.802,87.376 U4.4 | length 10
  Top Layer w0.381: D2.2@92.076,87.376 pad.2@93.802,87.376
  Bottom Layer w0.381: AR1.5@87.034,86.905 U4.4 88.662,86.395 88.925,86.131 93.269,86.131 93.802,86.665 pad.2@93.802,87.376
NetC2_1: C2.1 U1.43 | length 2.1
  Top Layer w0.254: U1.43 104.927,73.685 105.373,73.24 C2.1
NetC6_2: C6.2 U3.10 U3.11 | length 1.5
  Top Layer w0.203: C6.2 90.903,69.656 U3.11
NetC8_1: C8.1 DS1.2 | length 3.4
  Bottom Layer w0.381: C8.1 88.851,76.542 DS1.2
NetC8_2: C8.2 DS1.3 | length 5.1
  Bottom Layer w0.381: C8.2@88.849,78.186 89.137,78.186 89.551,77.772 DS1.3
NetC9_1: C9.1 DS1.4 | length 5.1
  Bottom Layer w0.381: DS1.4 90.251,77.741 90.695,78.186 C9.1@90.957,78.186
NetC9_2: C9.2 DS1.5 | length 3.4
  Bottom Layer w0.381: DS1.5 90.951,76.537 C9.2
NetC10_2: C10.2 DS1.27 | length 5.4
  Bottom Layer w0.381: C10.2 106.351,77.481 DS1.27
NetC11_2: C11.2 DS1.28 | length 3.4
  Bottom Layer w0.381: DS1.28 107.051,76.521 C11.2
NetC12_1: C12.1 R11.2 U4.3 | length 3.7
  Bottom Layer w0.381: U4.3 R11.2@88.662,89.715 ; R11.2 88.685,89.74 C12.1
NetC12_2: C12.2 C13.1 C14.2 R14.1 | length 8
  Bottom Layer w0.381: C13.1 85.268,92.849 R14.1 85.307,93.486 85.725,93.904 88.214,93.904 88.609,93.509 C14.2 C12.2
NetC16_1: C16.1 U5.40 | length 2.4
  Top Layer w0.254: C16.1 88.558,73.418 88.821,73.68 U5.40
NetC17_1: C17.1 U5.26 | length 2.9
  Top Layer w0.254: C17.1 91.546,81.415 U5.26
NetC17_2: C17.2 C18.1 L3.1 | length 3.1
  Top Layer w0.381: L3.1 88.812,83.083 ; C17.2 C18.1
NetC18_2: C18.2 C20.1 L2.2 | length 4.6
  Top Layer w0.254: L2.2@88.837,85.471 89.013,85.471 C18.2
  Top Layer w0.381: C20.1 87.235,85.153 87.554,85.471 L2.2@88.837,85.471
NetC19_1: C19.1 U5.25 | length 3.9
  Top Layer w0.254: U5.25 C19.1@92.046,83.834
NetC19_2: C19.2 C21.1 L2.1 | length 3
  Top Layer w0.381: L2.1 C21.1@93.585,85.573
NetC20_2: C20.2 E1.1 | length 3
  Top Layer w0.508: E1.1 83.185,84.607 C20.2
NetC22_2: C22.2 U5.22 Y2.1 | length 9.6
  Top Layer w0.254: U5.22 93.546,81.379 93.802,81.636 Y2.1@95.701,81.636 ; Y2.1 96.793,80.543 99.847,80.543 100.457,81.153 C22.2
NetC23_2: C23.2 U5.23 Y2.3 | length 10.8
  Top Layer w0.254: U5.23 93.046,81.616 94.158,82.728 97.149,82.728 Y2.3 98.349,85.166 97.942,85.573 C23.2
NetC24_1: C24.1 U1.1 Y1.2 | length 13.9
  Top Layer w0.254: C24.1 102.196,83.732 Y1.2 103.581,84.531 104.775,84.531 105.461,83.845 105.461,80.366 105.105,80.01 103.861,80.01 103.556,79.705 U1.1
NetC25_1: C25.1 U1.2 Y1.1 | length 6.4
  Top Layer w0.254: U1.2 103.048,80.442 Y1.1 C25.1@104.533,81.001
NetC26_1: C26.1 U5.32 Y3.2 | length 4.5
  Top Layer w0.254: C26.1 87.235,79.107 Y3.2 86.866,78.738 U5.32
NetC27_1: C27.1 U5.33 Y3.1 | length 7.1
  Top Layer w0.203: Y3.1 87.579,75.895 87.884,76.2 87.884,78.054 88.062,78.232 88.815,78.232 U5.33
  Top Layer w0.254: C27.1 86.081,75.514 Y3.1
NetD3_1: D3.1 R16.1 | length 1.7
  Bottom Layer w0.381: R16.1 D3.1@87.769,84.076
NetDS1_11: DS1.11 R7.2 | length 3.5
  Bottom Layer w0.381: R7.2 94.717,76.098 95.148,75.667 DS1.11@95.148,73.533
NetDS1_18: DS1.18 pad.2@100.482,68.377 R2.1 R9.2 U1.32 | length 15.6
  Top Layer w0.254: pad.2@100.482,68.377 100.66,68.199 101.219,68.199 101.524,68.504 U1.32
  Bottom Layer w0.381: R9.2 97.866,76.215 98.313,75.768 99.644,75.768 100.051,75.362 DS1.18 100.051,68.808 100.482,68.377 100.482,68.322 102.485,68.322 R2.1
NetDS1_19: DS1.19 DS1.20 pad.2@101.016,68.859 R1.1 R10.2 U1.31 | length 11.4
  Top Layer w0.254: pad.2@101.016,68.859 U1.31
  Bottom Layer w0.381: R10.2 99.62,76.479 99.898,76.479 100.751,75.627 DS1.19 ; pad.2@101.016,68.859 101.451,69.294 DS1.20 ; 101.502,70.206 R1.1
NetDS1_26: DS1.26 R8.2 | length 3.2
  Bottom Layer w0.381: DS1.26 R8.2@105.651,76.689
NetJ1_2: J1.2 pad.2@106.553,69.342 pad.7@107.29,69.342 pad.7@109.22,87.986 U1.33 | length 32.6
  Top Layer w0.254: U1.33 102.032,68.91 102.819,68.123 106.045,68.123 106.553,68.631 pad.2@106.553,69.342
  Top Layer w0.381: pad.7@107.29,69.342 108.915,69.342 109.423,69.85 109.423,73.533 110.084,74.193 110.084,75.362 109.22,76.225 pad.7@109.22,87.986
  Bottom Layer w0.254: pad.2@106.553,69.342 pad.7@107.29,69.342
  Bottom Layer w0.381: pad.7@109.22,87.986 109.22,89.51 110.099,90.388 J1.2
NetJ1_3: J1.3 pad.2@105.74,68.707 pad.7@107.29,68.707 pad.7@109.906,88.265 U1.34 | length 30.9
  Top Layer w0.254: U1.34 102.54,68.986 102.819,68.707 pad.2@105.74,68.707
  Top Layer w0.381: pad.7@107.29,68.707 109.347,68.707 110.084,69.444 110.084,70.764 110.719,71.399 110.719,75.641 109.906,76.454 pad.7@109.906,88.265
  Bottom Layer w0.381: pad.2@105.74,68.707 pad.7@107.29,68.707 ; pad.7@109.906,88.265 109.906,89.23 110.414,89.738 J1.3
NetL1_1: L1.1 U2.2 | length 3.6
  Bottom Layer w0.203: L1.1 102.565,90.576 103.23,91.241 U2.2
NETLABEL1: 
NetLS1_2: LS1.2 Q1.3 | length 1.2
  Bottom Layer w0.254: Q1.3 LS1.2@108.084,86.177
NetQ1_2: Q1.2 R18.2 R19.2 | length 3.1
  Bottom Layer w0.254: R18.2 R19.2 Q1.2@105.819,85.903
NetR17_1: R17.1 U5.30 | length 3.4
  Top Layer w0.254: R17.1 87.591,81.204 88.976,81.204 89.546,80.634 U5.30
NetU1_15: pad. U1.15 U5.16 | length 6
  Top Layer w0.254: U5.16 95.305,77.237 95.682,76.86 pad.@95.682,76.606 ; pad.@96.596,77.622 96.596,75.463 96.85,75.209 U1.15
  Bottom Layer w0.254: pad.@95.682,76.606 95.682,77.191 96.114,77.622 pad.@96.596,77.622
NetU1_16: U1.16 U5.17 | length 4.8
  Top Layer w0.254: U5.17 95.389,77.738 96.19,76.937 96.19,75.159 96.647,74.701 U1.16
RST: Designator2.2 pad.7@106.553,69.977 R3.1 U1.40 | length 12.2
  Top Layer w0.254: U1.40 104.673,72.161 104.978,71.857 104.978,70.942 105.283,70.637 106.197,70.637 106.553,70.282 pad.7@106.553,69.977
  Bottom Layer w0.254: pad.7@106.553,69.977 R3.1@108.534,69.977 ; R3.1 110.172,69.989 111.176,70.993 112.319,70.993 113.03,70.282 Designator2.2
RX: 
SCK: Designator4.1 pad.7@93.777,70.053 U1.20 U3.23 U6.8 | length 23.6
  Top Layer w0.203: pad.7@93.777,70.053 94.58,70.856 U3.23 95.367,70.856 95.529,71.018 95.529,71.831 96.368,72.669 U1.20
  Bottom Layer w0.203: Designator4.1 84.785,76.733 85.75,75.768 85.75,70.663 U6.8 ; 85.75,70.942 89.992,70.942 90.297,70.637 90.297,69.901 90.526,69.672 91.669,69.672 92.05,70.053 pad.7@93.777,70.053
SCL: 
SDA: 
SWCLK: Designator2.3 pad.7@109.423,74.701 U1.45 | length 10.7
  Top Layer w0.254: U1.45 pad.7@109.423,74.701
  Bottom Layer w0.254: pad.7@109.423,74.701 110.744,74.701 112.624,72.822 Designator2.3
SWDIO: Designator2.5 pad.7@108.991,75.209 U1.46 | length 12
  Top Layer w0.254: U1.46 pad.7@108.991,75.209
  Bottom Layer w0.254: pad.7@108.991,75.209 108.991,76.937 109.957,77.902 Designator2.5
TX: 
pads on no net: Designator1.1 Designator1.2 Designator1.3 Designator1.4 Designator1.5 Designator1.6 Designator1.7 DS1.7 E1.N/A J1.4 J1.6 J1.7 U1.22 U1.37 U1.38 U1.39 U1.41 U1.48 U1.49 U3.2 U3.3 U3.4 U3.5 U3.6 U3.7 U3.14 U3.15 U3.16 U3.17 U3.19 U3.21 U4.2 U4.5 U4.6 U5.2 U5.3 U5.5 U5.6 U5.7 U5.8 U5.9 U5.11 U5.12 U5.13 U5.14 U5.15 U5.18 U5.19 U5.34 U5.35 U5.36 U5.37 U5.38 U5.V@90.221,75.413 U5.V@90.221,76.2 U5.V@90.221,76.987 U5.V@90.221,77.775 U5.V@91.008,75.413 U5.V@91.008,76.2 U5.V@91.008,76.987 U5.V@91.008,77.775 U5.V@91.008,78.562 U5.V@91.796,75.413 U5.V@91.796,76.2 U5.V@91.796,76.987 U5.V@91.796,77.775 U5.V@91.796,78.562 U5.V@92.583,75.413 U5.V@92.583,76.2 U5.V@93.37,75.413 U5.V@93.37,76.2 U5.V@93.37,76.987 U5.V@93.37,77.775 U5.V@93.37,78.562
copper on no net: | length 14.3
  Top Layer w0.381: 124.993,89.139 127.914,89.139 ; 125.019,88.489 127.914,88.489 ; 125.019,89.789 127.914,89.789 ; 125.095,91.089 127.914,91.089 ; 125.161,90.439 127.914,90.439

## Polygon pours and split planes (outlines as drawn)
GND on GND "GND-No Net" (solid, remove dead copper, pour order 2): 80.594,92.746 80.594,85.268 84.404,85.268 84.404,77.927 80.594,77.927 80.594,66.319 80.62,66.294 116.281,66.294 116.281,94.767 104.673,94.767 104.673,88.849 100.406,88.849 100.406,92.772
3V3 on Power "GND-No Net" (solid, remove dead copper, pour order 4): 80.569,94.767 80.594,94.742 80.594,85.293 84.43,85.293 84.404,85.268 84.404,77.927 80.594,77.927 80.594,66.345 116.18,66.345 116.23,66.294 116.23,94.767 104.673,94.767 104.673,88.849 100.432,88.849 100.406,88.849 100.432,91.796 104.648,91.796 104.673,94.767 100.406,94.767

## Keep-outs
Keep-Out Layer:
  lines w0.254: 80.594,66.294 80.594,94.767 116.307,94.767 116.307,66.294 80.594,66.294

## Other copper
Top Layer:
  region net NetC6_2: 91.592,70.18 91.592,69.545 92.202,69.545 92.202,70.18
  region net 3V3: 91.211,79.527 91.211,80.391 89.916,80.391 89.916,79.527
Bottom Layer:
  region net GND: 91.872,92.481 91.872,91.389 98.984,91.389 98.984,92.481
  region net 3V3: 91.897,94.183 91.897,93.091 98.984,93.091 98.984,94.183
  rectangle net GND: 95.656,71.78 96.749,75.286
  rectangle net GND: 97.765,71.78 99.543,75.286
  rectangle net GND: 101.956,71.78 105.156,75.286
  rectangle net NetDS1_19: 100.559,71.78 101.651,75.286
  rectangle net GND: 107.544,71.78 108.61,75.286
  region net BAT: 107.005,91.364 106.497,91.364 106.497,90.627 107.005,90.627
  region net GND: 84.252,67.437 84.252,66.624 85.268,66.624 85.268,67.437

## Silkscreen, mask and mechanical layers (free items; w line width, h text height)
Top Overlay:
  circle w0.254: c79.045,81.61 r0.279
  lines w0.2: 121.336,86.995 123.749,86.995 ; 121.336,92.583 123.749,92.583
  lines w0.254: 71.78,80.797 72.771,81.788 72.796,81.788 ; 71.907,82.677 72.796,81.788 ; 72.784,79.743 72.784,83.858 73.812,82.829 73.812,82.804 72.796,81.788 ; 72.809,79.718 73.825,80.734 73.825,80.759 72.796,81.788 ; 77.14,78.311 cw(c79.045,81.61) 77.14,84.91 ; 77.775,79.41 cw(c79.045,81.61) 77.775,83.81 ; 78.41,80.51 cw(c79.045,81.61) 78.41,82.71
  text "AERO™Geek" at 96.19,90.272 h2.54

## Dimensions
116.307,94.767 to 116.307,66.294 on Top Overlay
80.594,66.294 to 116.307,66.294 on Top Overlay

## Text inside footprints (layer, text, board x,y; h text height)
U5: Top Overlay "*" at 88.915,72.952 h1.27 r90; Mechanical 1 "*" at 88.915,72.952 h1.27 r90